# Altium PCB Top Layer.PcbDoc
Units mm, origin at the board's own origin, x right, y up, seen from the top; angles counter-clockwise.
Board outline 45 x 45 mm, 2 copper layers (Top Layer, Bottom Layer); 10 components, 15 nets, 54 pads, 0 vias.
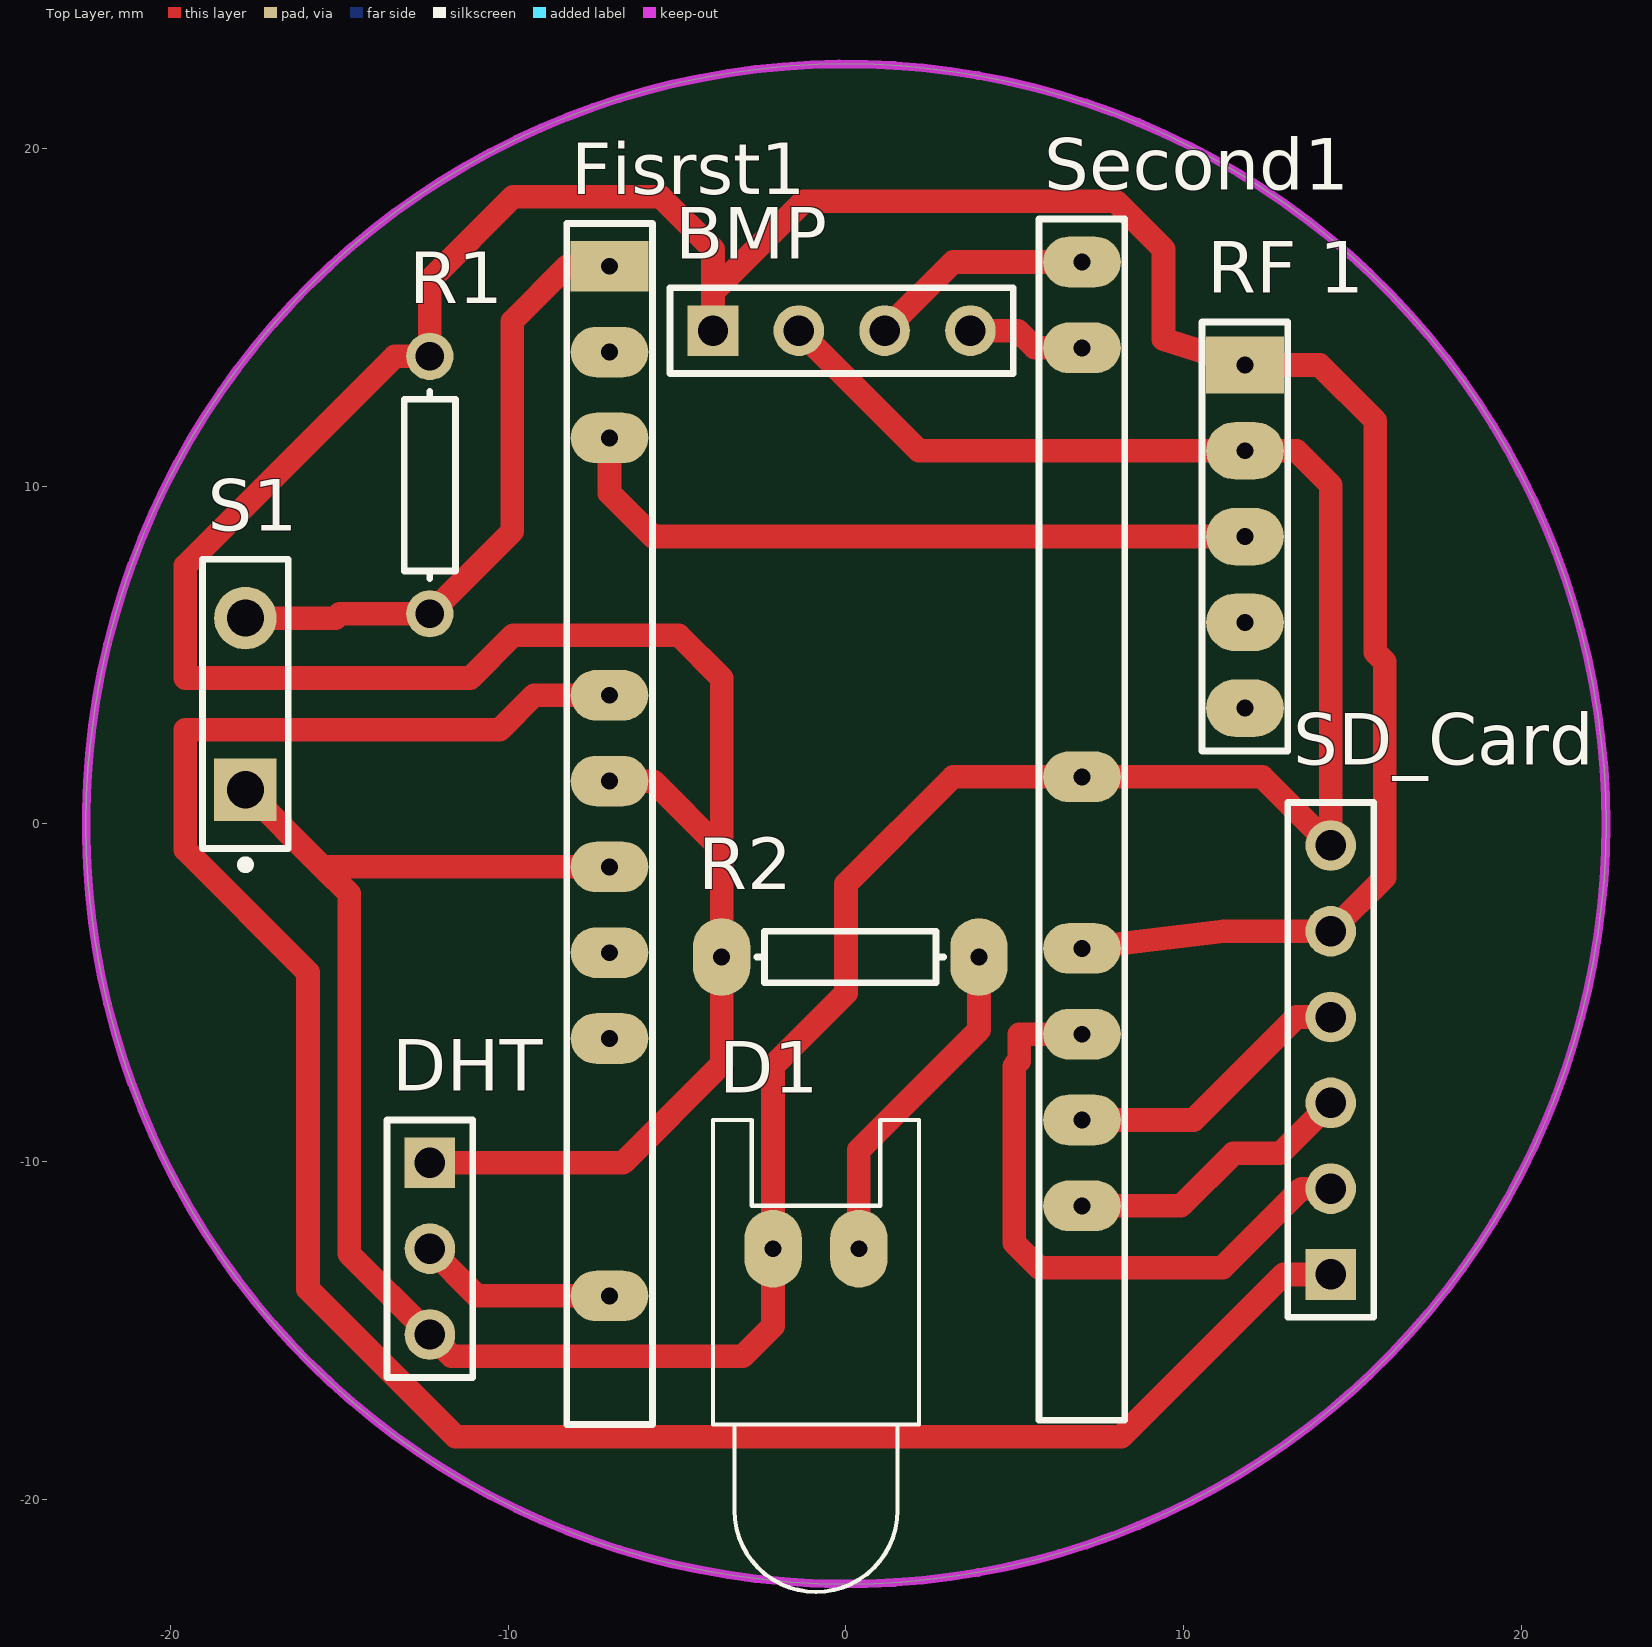
[diagram p0: Top Layer view]
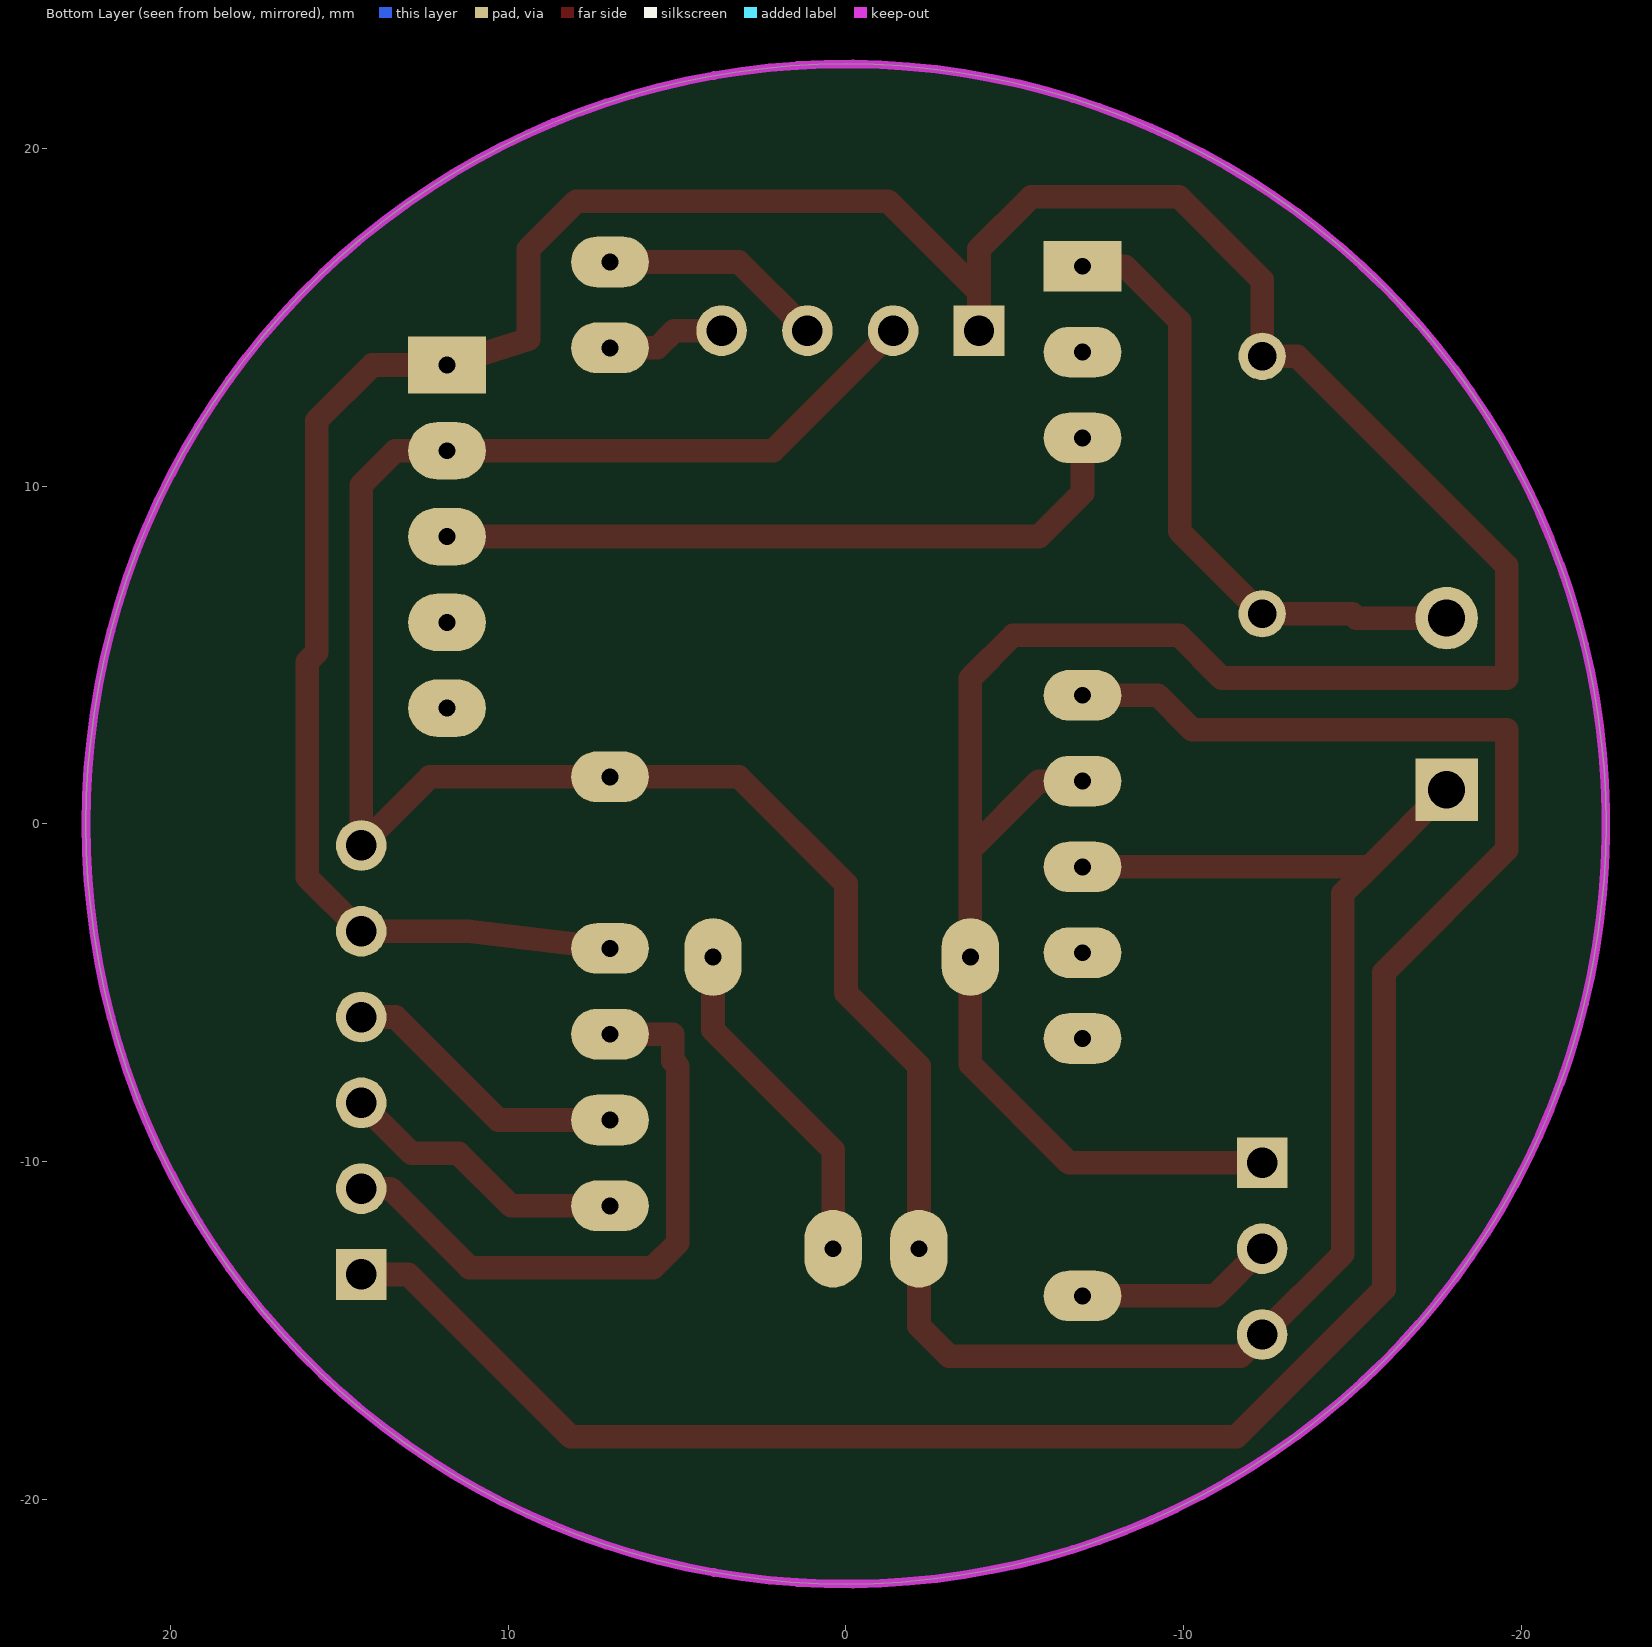
[diagram p1: Bottom Layer view, seen from below]

## Layer stack, top to bottom
Top Solder: solder mask 0.0102, Solder Resist, Dk 3.5
Top Layer: signal copper 0.0356
Dielectric 1: dielectric 0.32, FR-4, Dk 4.8
Bottom Layer: signal copper 0.0356
Bottom Solder: solder mask 0.0102, Solder Resist, Dk 3.5

## Board outline
-22.5,0 ccw(c0,0) 0,-22.5 ccw(c0,0) 22.5,0 ccw(c0,0) 0,22.5 ccw(c0,0)

## Design rules (kind name [scope] priority, off if disabled: settings)
Clearance [All] p1: gap=0.5 ignorepadtopadclearanceinfootprint=FALSE
ComponentClearance [All] p1: gap=0 collisioncheckmode=3 verticalgap=0 showdistances=FALSE
PolygonConnect [All] p1: connectstyle=Relief reliefconductorwidth=0.254 reliefentries=4 polygonreliefangle="90 Angle" airgapwidth=0.254
RoutingLayers [All] p1: top layer_v5=TRUE bottom layer_v5=FALSE
RoutingVias [All] p1: holewidth=0.711 width=1.27 viastyle="Through Hole" minholewidth=0.711 minwidth=1.27 maxholewidth=0.711 maxwidth=1.27
SolderMaskExpansion [All] p1: expansion=0.102
Width [All] p1: maxlimit=1 minlimit=0.5 preferedwidth=0.7
28 further rules are at their usual default settings.

## Components (designator, comment, footprint, x,y, rotation, side; value= is the part's Value field where it differs from the comment)
BMP "Header 4" HDR1X4 -3.937,14.605 r0 top
D1 "LED0" LED-0 -0.889,-12.573 r0 top
DHT "Header 3" HDR1X3 -12.319,-10.033 r270 top
Fisrst1 "Header 14" HDR1X14#1 -7,16.51 r270 top
R1 "Res1" AXIAL-0.3#1 -12.319,10.033 r90 top value=1K
R2 "Res1" AXIAL-0.3#2 0.127,-3.937 r0 top value=1K
"RF 1" "Header 5" HDR1X5 11.811,13.589 r270 top
S1 "SW-PB" SPST-2 -17.78,3.556 r90 top
SD_Card "Header 6" HDR1X6 14.351,-13.335 r90 top
Second1 "Header 14" HDR1X14#2 6.985,-16.383 r90 top

## Footprints (in the part's own frame and the unit in brackets; to place one, negate y for a bottom-side part, rotate by r counter-clockwise, add the part's x,y. Pads: shape width x height; smd on the part's side, far side on the other; paste and mask are expansions set on the pad)
AXIAL-0.3#1 [mm] "Axial Device, Thru-Hole; 2 Leads; 0.3 in Pin Spacing"
  round 1.4 hole 0.85: 1(-3.81,0) 2(3.81,0)
  silkscreen extent -2.77,-0.76 2.77,0.76
AXIAL-0.3#2 [mm] "Axial Device, Thru-Hole; 2 Leads; 0.3 in Pin Spacing"
  oval 1.7x2.3 hole 0.5: 1(-3.81,0) 2(3.81,0)
  silkscreen extent -2.77,-0.76 2.77,0.76
HDR1X3 [mm] "Connector; Header; 3 Position"
  rect 1.5x1.5 hole 0.9: 1(0,0)
  round 1.5 hole 0.9: 2(2.54,0) 3(5.08,0)
  silkscreen extent -1.27,-1.27 6.35,1.27
HDR1X4 [mm] "Connector; Header; 4 Position"
  rect 1.5x1.5 hole 0.9: 1(0,0)
  round 1.5 hole 0.9: 2(2.54,0) 3(5.08,0) 4(7.62,0)
  silkscreen extent -1.27,-1.27 8.89,1.27
HDR1X5 [mm] "Connector; Header; 5 Position"
  rect 1.7x2.3 hole 0.5: 1(0,0)
  oval 1.7x2.3 hole 0.5: 2(2.54,0) 3(5.08,0) 4(7.62,0) 5(10.16,0)
  silkscreen extent -1.27,-1.27 11.43,1.27
HDR1X6 [mm] "Connector; Header; 6 Position"
  rect 1.5x1.5 hole 0.9: 1(0,0)
  round 1.5 hole 0.9: 2(2.54,0) 3(5.08,0) 4(7.62,0) 5(10.16,0) 6(12.7,0)
  silkscreen extent -1.27,-1.27 13.97,1.27
HDR1X14#1 [mm] "Connector; Header; 14 Position"
  rect 1.5x2.3 hole 0.5: 1(0,0)
  oval 1.5x2.3 hole 0.5: 2(2.54,0) 3(5.08,0) 6(12.7,0) 7(15.24,0) 8(17.78,0) 9(20.32,0) 10(22.86,0) 13(30.48,0)
  round 0 all layers, no hole: 4(7.62,0) 5(10.16,0) 11(25.4,0) 12(27.94,0) 14(33.02,0)
  silkscreen extent -1.27,-1.27 34.29,1.27
HDR1X14#2 [mm] "Connector; Header; 14 Position"
  rect 0x0 all layers, no hole: 1(0,0)
  round 0 all layers, no hole: 2(2.54,0) 7(15.24,0) 9(20.32,0) 10(22.86,0) 11(25.4,0) 12(27.94,0)
  oval 1.5x2.3 hole 0.5: 3(5.08,0) 4(7.62,0) 5(10.16,0) 6(12.7,0) 8(17.78,0) 13(30.48,0) 14(33.02,0)
  silkscreen extent -1.27,-1.27 34.29,1.27
LED-0 [mm] "LED; 2 Leads"
  oval 1.7x2.3 hole 0.5: 1(1.27,0) 2(-1.27,0)
  silkscreen extent -3.05,-10.16 3.05,3.81
SPST-2 [mm] "Switch; 2 Leads"
  rect 1.85x1.85 hole 1.1: 1(-2.54,0)
  round 1.85 hole 1.1: 2(2.54,0)
  silkscreen extent -4.89,-1.27 4.28,1.27

## Part data
BMP: "Header, 4-Pin", LatestRevisionDate=17-Jul-2002, LatestRevisionNote="Re-released for DXP Platform.", Publisher="Altium Limited"
D1: "Typical INFRARED GaAs LED", LatestRevisionDate=08-Jul-2005, LatestRevisionNote="Mech Layer 1 removed.", PackageDescription="LED; 2 Leads", PackageReference=LED-0, Published=8-Jun-2000, Publisher="Altium Limited"
DHT: "Header, 3-Pin", LatestRevisionDate=17-Jul-2002, LatestRevisionNote="Re-released for DXP Platform.", Publisher="Altium Limited"
Fisrst1 Second1: "Header, 14-Pin", LatestRevisionDate=17-Jul-2002, LatestRevisionNote="Re-released for DXP Platform.", Publisher="Altium Limited"
R1 R2: "Resistor", LatestRevisionDate=17-Jul-2002, LatestRevisionNote="Re-released for DXP Platform.", PackageDescription="Axial Device, Thru-Hole; 2 Leads; 0.3 in Pin Spacing", PackageReference=AXIAL-0.3, Published=8-Jun-2000, Publisher="Altium Limited"
"RF 1": "Header, 5-Pin", LatestRevisionDate=17-Jul-2002, LatestRevisionNote="Re-released for DXP Platform.", Publisher="Altium Limited"
S1: "Switch", LatestRevisionDate=17-Jul-2002, LatestRevisionNote="Re-released for DXP Platform.", PackageDescription="Switch; 2 Leads", PackageReference=SPST-2, Published=24-Mar-1999, Publisher="Altium Limited"
SD_Card: "Header, 6-Pin", LatestRevisionDate=17-Jul-2002, LatestRevisionNote="Re-released for DXP Platform.", Publisher="Altium Limited"

## Nets (pads, with @x,y where several pads share a name; then routed paths per layer and width w, separated by ;. In a path a pad name is that pad's centre, name@x,y a point inside that pad or via, vN(x,y) a via of type N, cw(c..) or ccw(c..) an arc to the next point about the centre after c; other vN are vias at no path point)
"5 volt": "RF 1.1" BMP.1 DHT.1 Fisrst1.7 R1.2 R2.1 SD_Card.5 Second1.6 | length 118.3
  Top Layer w0.7: DHT.1 -6.604,-10.033 -3.683,-7.112 R2.1 -3.683,-0.762 ; Fisrst1.7 -5.715,1.27 -3.683,-0.762 ; BMP.1 -3.937,15.748 ; Second1.6 11.176,-3.175 SD_Card.5 15.951,-1.575 15.951,4.801 15.672,5.08 15.672,11.938 14.021,13.589 11.811,13.589 9.398,14.351 9.398,17.018 7.976,18.44 -1.245,18.44 -3.937,15.748 ; -3.937,15.748 -3.937,17.018 -5.486,18.567 -9.855,18.567 -12.319,16.104 R1.2 -13.36,13.843 -19.558,7.645 -19.558,4.321 -11.122,4.321 -9.855,5.588 -4.953,5.588 -3.683,4.318 -3.683,-0.762
CS: Fisrst1.6 SD_Card.1 | length 65.1
  Top Layer w0.7: Fisrst1.6 -9.232,3.81 -10.248,2.794 -19.558,2.794 -19.558,-0.762 -15.926,-4.394 -15.926,-13.769 -11.559,-18.136 8.153,-18.136 12.954,-13.335 SD_Card.1
DHT_Data: DHT.2 Fisrst1.13 | length 5.9
  Top Layer w0.7: DHT.2 -10.922,-13.97 Fisrst1.13
GND: "RF 1.2" BMP.2 D1.2 DHT.3 Fisrst1.8 S1.1 SD_Card.6 Second1.8 | length 96.5
  Top Layer w0.7: S1.1 -15.494,-1.27 ; Fisrst1.8 -15.494,-1.27 ; BMP.2 2.159,11.049 11.811,11.049 13.335,11.049 14.351,10.033 SD_Card.6 12.319,1.397 Second1.8 3.175,1.397 0,-1.778 0,-5.004 -2.159,-7.163 D1.2 -2.159,-14.859 -3.052,-15.752 -11.68,-15.752 DHT.3 -14.707,-12.725 -14.707,-2.057 -15.494,-1.27
MISO: SD_Card.4 Second1.4 | length 8.6
  Top Layer w0.7: Second1.4 10.287,-8.763 13.335,-5.715 SD_Card.4
MOSI: SD_Card.3 Second1.3 | length 8.6
  Top Layer w0.7: Second1.3 9.913,-11.303 11.466,-9.75 12.856,-9.75 SD_Card.3
NetD1_1: D1.1 R2.2 | length 10.1
  Top Layer w0.7: D1.1 0.381,-9.652 3.937,-6.096 R2.2
"OSCILATOR 1": Fisrst1.9
"OSCILATOR 2": Fisrst1.10
RESET: Fisrst1.1 R1.1 S1.2 | length 18.7
  Top Layer w0.7: S1.2 -15.113,6.096 -14.986,6.223 R1.1 -9.881,8.661 -9.881,14.884 -8.255,16.51 Fisrst1.1
RX: Fisrst1.2
SCK: SD_Card.2 Second1.5 | length 18.7
  Top Layer w0.7: Second1.5 5.131,-6.223 5.131,-7.017 4.978,-7.169 4.978,-12.395 5.715,-13.132 11.151,-13.132 13.487,-10.795 SD_Card.2
SCL: BMP.3 Second1.14 | length 6.7
  Top Layer w0.7: BMP.3 3.175,16.637 Second1.14
SDA: BMP.4 Second1.13 | length 3.5
  Top Layer w0.7: BMP.4 5.08,14.605 5.588,14.097 Second1.13
TX: "RF 1.3" Fisrst1.3 | length 21
  Top Layer w0.7: Fisrst1.3 -7,9.794 -5.715,8.509 11.811,8.509
pads on no net: "RF 1.4" "RF 1.5" Fisrst1.4 Fisrst1.5 Fisrst1.11 Fisrst1.12 Fisrst1.14 Second1.1 Second1.2 Second1.7 Second1.9 Second1.10 Second1.11 Second1.12

## Keep-outs
Keep-Out Layer:
  circle w0.254: c0,0 r22.5